# Altium PCB PCB1.PcbDoc
Units mil, origin at the board's own origin, x right, y up, seen from the top; angles counter-clockwise.
Board outline 2350.02 x 1095.03 mil, 2 copper layers (Top Layer, Bottom Layer); 32 components, 51 nets, 166 pads, 16 vias.
Unrouted connection lines stored in the file: 62.
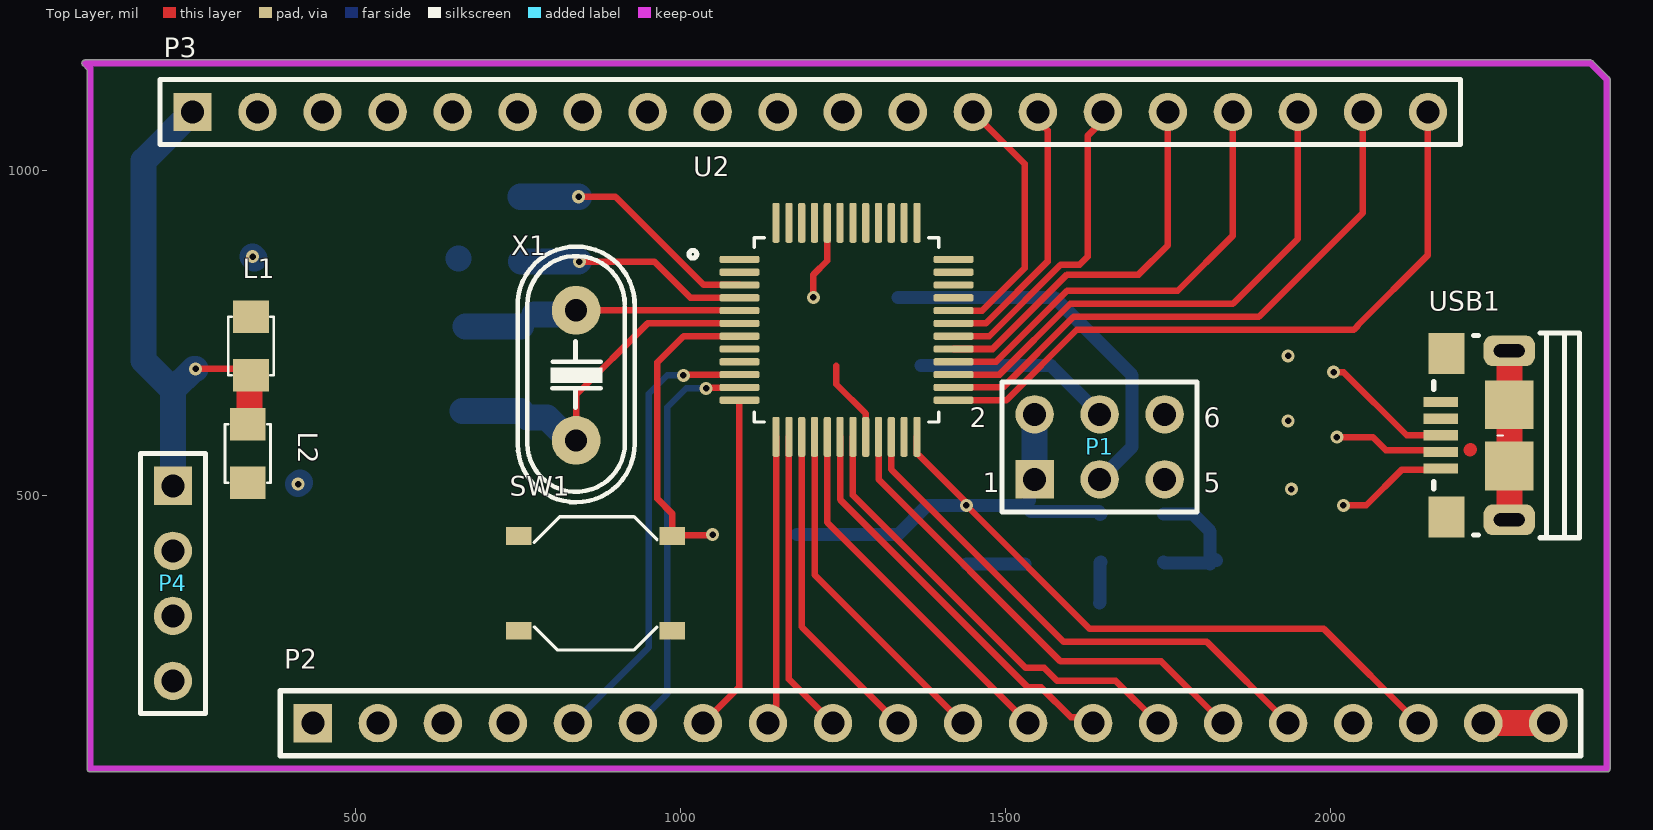
[diagram p0: Top Layer view]
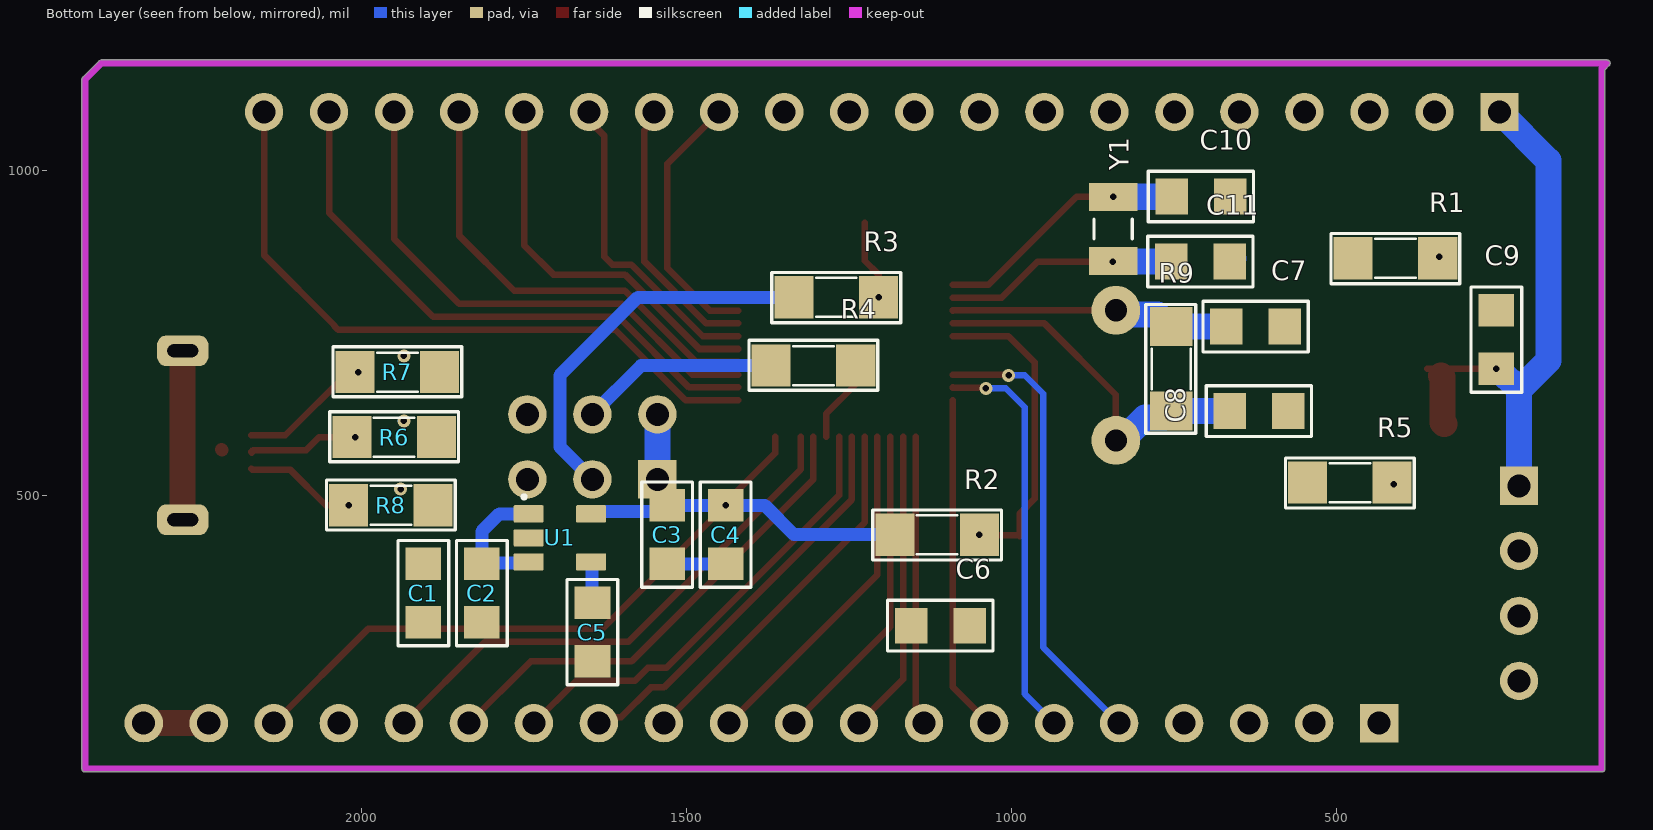
[diagram p1: Bottom Layer view, seen from below]

## Layer stack, top to bottom
Top Solder: solder mask 0.4, Solder Resist, Dk 3.5
Top Layer: signal copper 1.4
Dielectric 1: dielectric 12.6, FR-4, Dk 4.8
Bottom Layer: signal copper 1.4
Bottom Solder: solder mask 0.4, Solder Resist, Dk 3.5

## Board outline
87.97,1154.94 81.45,1161.45 81.47,1161.44 cw(c85,1165) 85,1170.01 2400,1170.01 2403.55,1168.55 2428.55,1143.55 2430.02,1140 2430.02,80 cw(c2425,80) 2425,74.99 92.99,74.99 cw(c92.99,80) 87.97,80

## Design rules (kind name [scope] priority, off if disabled: settings)
Clearance [All] p1: gap=0 ignorepadtopadclearanceinfootprint=FALSE except(40: Arc-Fill Arc-Poly Arc-Region Track-Fill Track-Poly Track-Region)
ComponentClearance [All] p1: gap=1 collisioncheckmode=3 verticalgap=10 showdistances=FALSE
PolygonConnect [All] p1: connectstyle=Relief reliefconductorwidth=10 reliefentries=4 polygonreliefangle="90 Angle" airgapwidth=10
RoutingVias [All] p1: holewidth=15 width=30 viastyle="Through Hole" minholewidth=10 minwidth=20 maxholewidth=28 maxwidth=50
SolderMaskExpansion [All] p1: expansion=4 istentingtop=FALSE
Width Width_1 [All] p1: maxlimit=40 minlimit=10 preferedwidth=20 minimp=50.000000 maximp=50.000000 favimp=50.000000
Width [All] p2 off: maxlimit=10 minlimit=10 preferedwidth=10
29 further rules are at their usual default settings.

## Components (designator, comment, footprint, x,y, rotation, side; value= is the part's Value field where it differs from the comment)
C1 "103" C-0805 1905,350 r90 bottom
C2 "103" C-0805 1815,350 r90 bottom
C3 "103" C-0805 1530,440 r90 bottom
C4 "103" C-0805 1440,440 r90 bottom
C5 "103" C-0805 1645,290 r90 bottom
C6 "103" C-0805 1110,300 r180 bottom
C7 "103" C-0805 625,760 r0 bottom
C8 "103" C-0805 620,630 r0 bottom
C9 "103" C-0805 255,740 r270 bottom
C10 "103" C-0805 709.21,960 r0 bottom
C11 "103" C-0805 710,860 r0 bottom
L1 "LED 0805" LED-0805-Blue 340,685 r90 top
L2 "LED 0805" LED-0805-Red 335,610 r270 top
P1 "Header 3X2" HDR2X3 1545,525 r0 top
P2 "Header 20" HDR1X20 435,150 r0 top
P3 "Header 20" HDR1X20 250,1090 r0 top
P4 "Header 4" HDR1X4 220,515 r270 top
R1 "240" SM-1206 410,865 r0 bottom value="R1/4W - 1K"
R2 "1k" SM-1206 1115,440 r0 bottom value="R1/4W - 1K"
R3 "100k" SM-1206 1270,805 r0 bottom value="R1/4W - 1K"
R4 "100k" SM-1206 1305,700 r180 bottom value="R1/4W - 1K"
R5 "240" SM-1206 480,520 r0 bottom value="R1/4W - 1K"
R6 "20" SM-1206 1950,590 r180 bottom value="R1/4W - 1K"
R7 "20" SM-1206 1945,690 r180 bottom value="R1/4W - 1K"
R8 "4.7k" SM-1206 1955,485 r180 bottom value="R1/4W - 1K"
R9 "1k" SM-1206 755,695 r90 bottom value="R1/4W - 1K"
SW1 "SMD-BUTTON(4P-5.2X5.2X1.5MM-SKQGAKE010)" SW4-SMD-5.2X5.2X1.5MM 870,365 r0 top
U1 "RT9193-33GB" SOT94P279X129-5N 1695,435 r180 bottom
U2 "STM32F103C8T6" QFP50P900X900X160-48N 1255.79,755 r0 top
USB1 "USB Micro 5p DIP" "USB Micro 5p DIP" 2275,592.76 r90 top
X1 "4Mhz" XT2 840,685 r270 top
Y1 "ABS07-32.768KHZ-T" XTAL_ABS07-32.768KHZ-T 844.21,910 r90 bottom

## Footprints (in the part's own frame and the unit in brackets; to place one, negate y for a bottom-side part, rotate by r counter-clockwise, add the part's x,y. Pads: shape width x height; smd on the part's side, far side on the other; paste and mask are expansions set on the pad)
C-0805 [mil] "Compoment SMD 80x50mil"
  rect 50x55 smd: 1(-45,0) 2(45,0)
  silkscreen extent -81,-39 81,39, body extent -40,-25 40,25, height 24
HDR1X4 [mm] "Connector; Header; 4 Position"
  rect 1.5x1.5 hole 0.9: 1(0,0)
  round 1.5 hole 0.9: 2(2.54,0) 3(5.08,0) 4(7.62,0)
  silkscreen extent -1.27,-1.27 8.89,1.27, body extent -1.27,-1.27 8.89,1.27, height 7
HDR1X20 [mm] "Connector; Header; 20 Position"
  rect 1.5x1.5 hole 0.9: 1(0,0)
  round 1.5 hole 0.9: 2(2.54,0) 3(5.08,0) 4(7.62,0) 5(10.16,0) 6(12.7,0) 7(15.24,0) 8(17.78,0) 9(20.32,0) 10(22.86,0) 11(25.4,0) 12(27.94,0) 13(30.48,0) 14(33.02,0) 15(35.56,0) 16(38.1,0) 17(40.64,0) 18(43.18,0) 19(45.72,0) 20(48.26,0)
  silkscreen extent -1.27,-1.27 49.53,1.27, body extent -1.27,-1.3 49.53,1.27, height 7
HDR2X3 [mm] "Connector; Header; 3x2 Position"
  rect 1.5x1.5 hole 0.9: 1(0,0)
  round 1.5 hole 0.9: 2(0,2.54) 3(2.54,0) 4(2.54,2.54) 5(5.08,0) 6(5.08,2.54)
  silkscreen extent -1.27,-1.27 6.35,3.81, body extent -1.27,-1.27 6.35,3.81, height 7
LED-0805-Blue [mil]
  rect 50x55 smd: 1(0,0) 2(90,0)
  silkscreen extent 0,-35 90,35, body extent 5,-25 85,25, height 43
LED-0805-Red [mil]
  rect 50x55 smd: 1(0,0) 2(90,0)
  silkscreen extent 0,-35 90,35, body extent 5,-25 85,25, height 43
QFP50P900X900X160-48N [mm]
  rrect50% 1.56x0.28 smd: 1(-4.18,2.75) 2(-4.18,2.25) 3(-4.18,1.75) 4(-4.18,1.25) 5(-4.18,0.75) 6(-4.18,0.25) 7(-4.18,-0.25) 8(-4.18,-0.75) 9(-4.18,-1.25) 10(-4.18,-1.75) 11(-4.18,-2.25) 12(-4.18,-2.75) 25(4.18,-2.75) 26(4.18,-2.25) 27(4.18,-1.75) 28(4.18,-1.25) 29(4.18,-0.75) 30(4.18,-0.25) 31(4.18,0.25) 32(4.18,0.75) 33(4.18,1.25) 34(4.18,1.75) 35(4.18,2.25) 36(4.18,2.75)
  rrect50% 0.28x1.56 smd: 13(-2.75,-4.18) 14(-2.25,-4.18) 15(-1.75,-4.18) 16(-1.25,-4.18) 17(-0.75,-4.18) 18(-0.25,-4.18) 19(0.25,-4.18) 20(0.75,-4.18) 21(1.25,-4.18) 22(1.75,-4.18) 23(2.25,-4.18) 24(2.75,-4.18) 37(2.75,4.18) 38(2.25,4.18) 39(1.75,4.18) 40(1.25,4.18) 41(0.75,4.18) 42(0.25,4.18) 43(-0.25,4.18) 44(-0.75,4.18) 45(-1.25,4.18) 46(-1.75,4.18) 47(-2.25,4.18) 48(-2.75,4.18)
  silkscreen extent -6.15,-3.6 3.6,3.6, body extent -4.5,-4.5 4.5,4.5, height 1.6
SM-1206 [mil] "Compoment SMD 120x60mil"
  rect 60x65 smd: 1(-65,0) 2(65,0)
  silkscreen extent -99,-38 99,39, body extent -83,-35 83,36, height 25
SOT94P279X129-5N [mm]
  rrect12% 1.17x0.67 smd: 1(-1.22,0.94) 2(-1.22,0) 3(-1.22,-0.94) 4(1.22,-0.94) 5(1.22,0.94)
  silkscreen extent -1.47,1.53 -1.33,1.67, body extent -1.4,-1.45 1.4,1.45, height 1.3
SW4-SMD-5.2X5.2X1.5MM [mm]
  rect 1x0.7 smd: 1(-3,1.85) 2(3,1.85) 3(-3,-1.85) 4(3,-1.85)
  silkscreen extent -2.4,-2.6 2.4,2.6
"USB Micro 5p DIP" [mm]
  rect 0.4x1.35 smd mask+0.05: 1(-1.3,2.675) 2(-0.65,2.675) 3(0,2.675) 4(0.65,2.675) 5(1.3,2.675)
  rrect60% 1.2x2 hole 0.5 slot 1.2 at 90 deg: 5(-3.3,0) 5(3.3,0)
  rect 1.6x1.4 smd: 5(-3.2,2.45) 5(3.2,2.45)
  rect 1.9x1.9 smd paste-10: 5(-1.2,0) 5(1.2,0)
  silkscreen extent -4,-2.75 4,2.95, body extent -3.93,-2.76 3.93,2.9, height 2.85
XT2 [mil] "Footpin for Crystal 2 pin"
  round 75 hole 34: 1(-100,0) 2(100,0)
  silkscreen extent -198,-90 195,90, body extent -233,-93 213,90, height 138
XTAL_ABS07-32.768KHZ-T [mm]
  rect 1.1x1.9 smd: 1(-1.25,0) 2(1.25,0)
  silkscreen extent -0.38,-0.75 0.38,0.75, body extent -1.6,-0.75 1.6,0.75, height 0.89

## Part data
C1 C2 C3 C4 C5 C6 C7 C8 C9 C10 C11: library part C, "Cap SMD"
L1: library part "LED 0805 Xanh Duong", "Dán", Chung_Loai=Dán, Don_Vi=Con, Ma_Hang=MH002327, Ten_Linh_Kien="LED 0805 Màu Xanh Dương (Blue)"
L2: library part "LED 0805 Do", "Dán", Chung_Loai=Dán, Don_Vi=Con, Ma_Hang=MH000897, Ten_Linh_Kien="LED 0805 Màu Đỏ (Red)"
P1: "Header, 3-Pin, Dual row", LatestRevisionDate=17-Jul-2002, LatestRevisionNote="Re-released for DXP Platform.", Publisher="Altium Limited"
P2 P3: "Header, 20-Pin", LatestRevisionDate=17-Jul-2002, LatestRevisionNote="Re-released for DXP Platform.", Publisher="Altium Limited"
P4: "Header, 4-Pin", LatestRevisionDate=17-Jul-2002, LatestRevisionNote="Re-released for DXP Platform.", Publisher="Altium Limited"
R1 R2 R3 R4 R5 R6 R7 R8 R9: library part R, "Resistor 1/4W"
SW1: "Switch Tactile N.O. SPST Button Gull Wing 0.05A 12VDC 3.43N SMD T/R", Package=None, Availability=Unavailable, MF=ALPS, MP=SKQGAKE010, Price=None, SnapEDA_Link=https://www.snapeda.com/parts/SKQGAKE010/ALPS/view-part/51324/?ref=snap
U1: "Linear Voltage Regulator IC Positive Fixed 1 Output 300mA TSOT-23-5", Package="SOT-23-5 Richtek", Check_prices=https://www.snapeda.com/parts/RT9193-33GB/Richtek+USA+Inc./view-part/?ref=eda, Digi-Key_Part_Number=1028-1014-2-ND, MF="Richtek USA", MP=RT9193-33GB, Purchase-URL=https://pricing.snapeda.com/search/part/RT9193-33GB/?ref=eda, SnapEDA_Link=https://www.snapeda.com/parts/RT9193-33GB/Richtek+USA+Inc./view-part/?ref=snap
U2: "ARM® Cortex®-M3 STM32F1 Microcontroller IC 32-Bit 72MHz 64KB (64K x 8) FLASH 48-LQFP (7x7)", Package="LQFP-48 STMicroelectronics", Check_prices=https://www.snapeda.com/parts/STM32F103C8T6/STMicroelectronics/view-part/?ref=eda, MF=STMicroelectronics, MP=STM32F103C8T6, SnapEDA_Link=https://www.snapeda.com/parts/STM32F103C8T6/STMicroelectronics/view-part/?ref=snap
USB1: "USB Type B", Ma_Hang=MH005145, Ten="MicroUSB MK5P DIP"
X1: library part XT2, "Crystal For all Crystal 2pin."
Y1: "32.768 kHz Â±20ppm Crystal 12.5pF 70 kOhms 2-SMD, No Lead", Package="SMD-2 Abracon LLC", Availability="In Stock", Check_prices=https://www.snapeda.com/parts/ABS07-32.768KHZ-T/Abracon+LLC/view-part/?ref=eda, MF=Abracon, MP=ABS07-32.768KHZ-T, Price=None, Purchase-URL=https://pricing.snapeda.com/search/part/ABS07-32.768KHZ-T/?ref=eda, SnapEDA_Link=https://www.snapeda.com/parts/ABS07-32.768KHZ-T/Abracon+LLC/view-part/?ref=snap

## Via types
v1: diameter 20, hole 10, Top Layer to Bottom Layer, 16 vias

## Nets (pads, with @x,y where several pads share a name; then routed paths per layer and width w, separated by ;. In a path a pad name is that pad's centre, name@x,y a point inside that pad or via, vN(x,y) a via of type N, cw(c..) or ccw(c..) an arc to the next point about the centre after c; other vN are vias at no path point)
3.3V: C3.2 C4.2 C9.2 L1.1 L2.1 P1.1 P1.2 P2.18 P3.1 P4.1 R2.2 U1.5 U2.9 U2.24 U2.36 U2.48 | length 2465.9
  Top Layer w10: v1(255,695) L1.1@361.35,695 ; U2.24 1364.06,565.24 1438.09,491.2 1438.09,486.91 v1(1440,485) 1630,295 1990,295 P2.18
  Top Layer w40: L2.1 337.5,612.5 337.5,682.5 L1.1
  Bottom Layer w20: R2.2 1335,440 1380,485 v1(1440,485) C3.2 ; P1.1 1537.5,517.5 1537.5,492.5 C3.2 ; U1.5@1645.96,471 U1.5 1643.78,475.2 1539.8,475.2 C3.2
  Bottom Layer w40: P4.1 220,662.5 ; P3.1 175,1015 175,707.5 220,662.5 ; v1(255,695) 252.5,695 220,662.5 ; P1.1 P1.2
5V: C1.2 C2.2 P3.3 R8.1 U1.1 U1.3 USB1.1 | length 381.6
  Top Layer w10: v1(2020,485) 2055,485 2110,540 2168.11,540 USB1.1
  Bottom Layer w20: U1.3 1744.53,396.5 1813.5,396.5 C2.2 1815,445 1787.99,472.01 U1.1 ; C2.2@1823.5,401.5 C2.2@1825,400
BOOT0: R3.1 U2.44 | length 123.4
  Top Layer w10: v1(1205,805) 1205,840 1226.26,861.26 U2.44
BOOT1: R4.2 U2.20 | length 128.3
  Top Layer w10: 1240,700 1240,671.46 1285.32,626.14 U2.20
GND: C1.1 C2.1 C3.1 C4.1 C5.1 C6.1 C7.1 C8.1 C9.1 C10.1 C11.1 P1.5 P1.6 P2.19 P2.20 P3.2 P4.4 R1.2 U1.2 U2.8 U2.23 U2.35 U2.47 USB1.4 USB1.5 | length 449.8
  Top Layer w40: P2.19 P2.20 ; USB1.5@2275,462.83 2275,545.51 2275,640 USB1.5@2275,722.68
  Bottom Layer w20: C4.1 C3.1
NetC5_2: C5.2 U1.4 | length 63.8
  Bottom Layer w20: C5.2 1645.98,335.98 1645.98,397.01 U1.4
NetC6_2: C6.2 SW1.4
NetL1_2: L1.2 R1.1 | length 3.5
  Bottom Layer w40: v1(342.5,867.5) R1.1
NetL2_2: L2.2 R5.1 | length 3.5
  Bottom Layer w40: v1(412.5,517.5) R5.1
NetP1_3: P1.3 R3.2 | length 590.4
  Bottom Layer w20: R3.2 1575,805 1695,685 1695,575 P1.3
NetP1_4: P1.4 R4.1 | length 306.1
  Bottom Layer w20: R4.1 1570,700 P1.4
NetR6_1: R6.1 USB1.2 | length 176.5
  Top Layer w10: v1(2010,590) 2065,590 2085,570 2166.85,570 USB1.2 USB1.2@2168.6,566.08
  Top Layer w20: 2214.41,570 2215,570.59
  Bottom Layer w10: v1(2010,590) R6.1
NetR7_1: R7.1 USB1.3 | length 210
  Top Layer w10: v1(2005,690) 2005.18,689.82 2020.18,689.82 2117.24,592.76 USB1.3
  Bottom Layer w10: v1(2005,690) R7.1
PA0: P2.5 U2.10 | length 706.7
  Top Layer w10: v1(1005,685) 1005.59,685.59 1090.71,685.59 U2.10
  Bottom Layer w10: P2.5 951.54,266.54 951.54,656.54 980,685 v1(1005,685)
PA1: P2.6 U2.11 | length 628.4
  Top Layer w10: v1(1040,665) 1040.91,665.91 1090.71,665.91 U2.11
  Bottom Layer w10: P2.6 980,195 980,635.84 1009.16,665 v1(1040,665)
PA2: P2.7 U2.12 | length 520
  Top Layer w10: P2.7 1091.22,206.22 U2.12
PA3: P2.8 U2.13 | length 445.6
  Top Layer w10: P2.8 1147.52,162.52 U2.13
PA4: P2.9 U2.14 | length 468.5
  Top Layer w10: U2.14 1167.2,217.8 P2.9
PA5: P2.10 U2.15 | length 501.8
  Top Layer w10: U2.15 1186.89,298.11 P2.10
PA6: P2.11 U2.16 | length 535
  Top Layer w10: U2.16 1206.57,378.43 P2.11
PA7: P2.12 U2.17 | length 568.3
  Top Layer w10: U2.17 1226.26,458.74 P2.12
PA8: P3.16 U2.29 | length 600.7
  Top Layer w10: U2.29 1480.47,725.47 1595,840 1705,840 1750,885 P3.16
PA9: P3.15 U2.30 | length 489.1
  Top Layer w10: U2.30 1475.16,745.16 1585,855 1614.14,855 1626.47,867.33 1626.47,1053.2 1650,1076.73 P3.15
PA10: P3.14 U2.31 | length 420.3
  Top Layer w10: U2.31 1469.84,764.84 1565,860 1565,1061.73 1550,1076.73 P3.14
PA11: P3.13 R6.2 U2.32 | length 414.9
  Top Layer w10: U2.32 1464.53,784.53 1530,850 1530,1010 P3.13
  Bottom Layer w10: v1(1935,615) v1@1940,615
PA12: P3.12 R7.2 R8.2 U2.33 | length 5.8
  Bottom Layer w10: v1(1935,715) v1@1935.79,715 ; v1(1940,510) v1@1945,510
PA15: P3.11 U2.38
PB0: P2.13 U2.18 | length 627.9
  Top Layer w10: U2.18 1245.94,494.06 1535,205 1555,205 1600.61,159.39 1625.61,159.39 P2.13
PB1: P2.14 U2.19 | length 704.4
  Top Layer w10: U2.19 1265.63,500.63 1531.26,235 1560,235 1580,215 1670,215 P2.14
PB3: P3.10 U2.39
PB4: P3.9 U2.40
PB5: P3.8 U2.41
PB6: P3.7 U2.42
PB7: P3.6 U2.43
PB8: P3.5 U2.45
PB9: P3.4 U2.46
PB10: P2.15 U2.21 | length 750.8
  Top Layer w10: U2.21 1305,525 1585,245 1740,245 P2.15
PB11: P2.16 U2.22 | length 822.1
  Top Layer w10: U2.22 1324.68,540.32 1590,275 1810,275 P2.16
PB12: P3.20 U2.25 | length 1042.8
  Top Layer w10: U2.25 1501.73,646.73 1610,755 2036.21,755 2042.07,760.86 2042.07,762.07 2150,870 P3.20
PB13: P3.19 U2.26 | length 895.9
  Top Layer w10: U2.26 1496.42,666.42 1605,775 1890,775 2050,935 P3.19
PB14: P3.18 U2.27 | length 811.2
  Top Layer w10: U2.27 1491.1,686.1 1600,795 1850,795 1950,895 P3.18
PB15: P3.17 U2.28 | length 700.1
  Top Layer w10: U2.28 1485.79,705.79 1595,815 1765,815 1850,900 P3.17
PC13: P2.2 R5.2 U2.2
PC14: C10.2 P2.3 U2.3 Y1.2 | length 393.9
  Top Layer w10: v1(843.82,959.61) 900.39,959.61 1036.1,823.9 U2.3
  Bottom Layer w40: C10.2 754.61,959.61 v1(843.82,959.61) Y1.2
PC15: C11.2 P2.4 U2.4 Y1.1 | length 372.1
  Top Layer w10: v1(845,860) 960,860 1015.79,804.21 U2.4
  Bottom Layer w10: Y1.1 850.79,860.79 850,860 v1(845,860)
  Bottom Layer w40: 658.82,864.61 659.21,865 ; C11.2 755.39,860.39 843.82,860.39 Y1.1
PD0: C7.2 R9.2 U2.5 X1.1 | length 403.4
  Top Layer w10: X1.1 840.24,784.76 1090.98,784.76 U2.5
  Bottom Layer w40: C7.2 R9.2 ; R9.2@775.8,778.3 833.3,778.3 X1.1
PD1: C8.2 R9.1 U2.6 X1.2 | length 560.4
  Top Layer w10: X1.2 840,655 949.84,764.84 U2.6
  Bottom Layer w40: C8.2 R9.1 765,620 795.53,620 830.53,585 X1.2
RESET: P2.17 R2.1 SW1.1 SW1.2 U2.7 | length 482.4
  Top Layer w10: v1(1050,440) 1048.92,438.92 989.19,438.92 SW1.2 988.11,471.89 965,495 965,705 1005.16,745.16 U2.7
SWDCLK: P4.3 U2.37
SWDIO: P4.2 U2.34
VBAT: P2.1 U2.1
pads on no net: SW1.3

## Keep-outs
Keep-Out Layer:
  lines w10: 85,1165 92.99,1157.01 92.99,80 2425,80 2425,1140 2400,1165 85,1165

## Text inside footprints (layer, text, board x,y; h text height)
P1: Top Overlay "1" at 1465,505 h30; Top Overlay "2" at 1445,605 h30; Top Overlay "5" at 1805,505 h30; Top Overlay "6" at 1805,605 h30